# Altium PCB AVRDevBoard.PcbDoc (part 3 of 3)
Units mm, origin at the board's own origin, x right, y up, seen from the top; angles counter-clockwise.
Board outline 84.2 x 55.88 mm, 2 copper layers (Top Layer, Bottom Layer); 37 components, 46 nets, 157 pads, 38 vias.
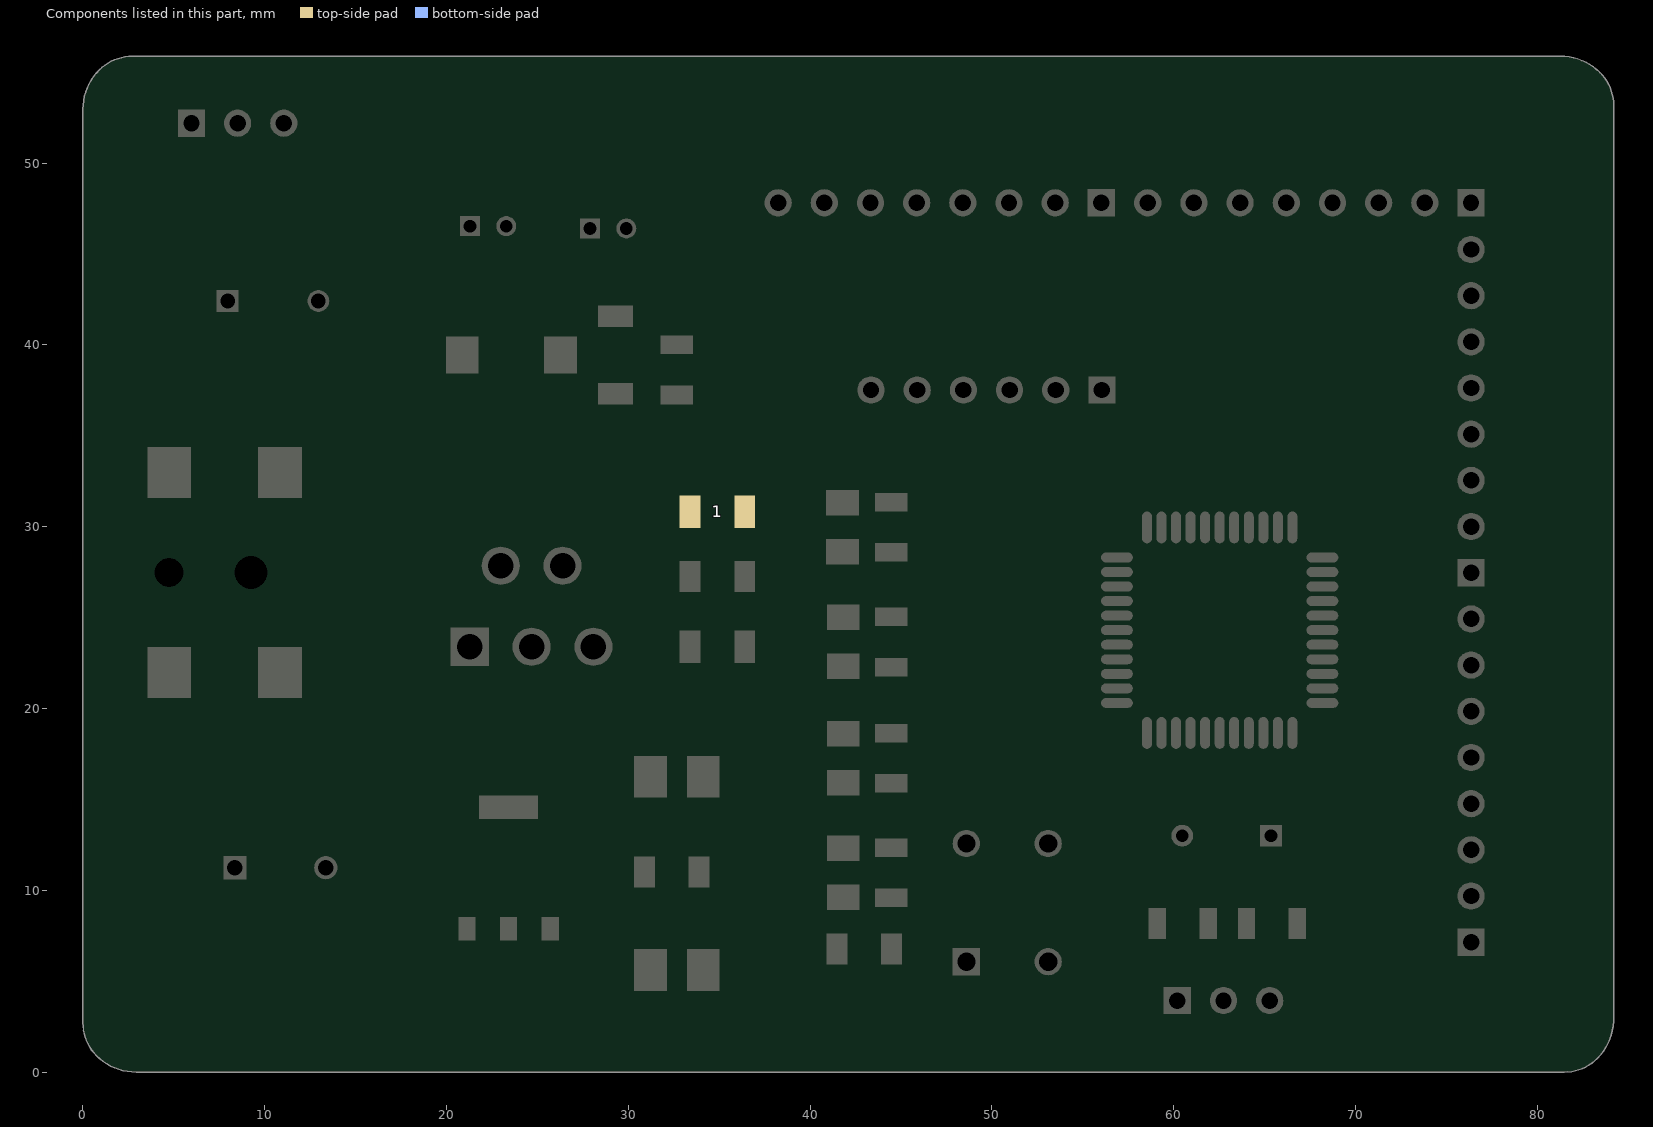
[diagram p3: the components of this part, seen from the top]

## Via types
v1: diameter 0.6, hole 0.3, Top Layer to Bottom Layer, 24 vias
v2: diameter 0.5, hole 0.3, Top Layer to Bottom Layer, 13 vias
v3: diameter 0.7, hole 0.4, Top Layer to Bottom Layer, 1 vias

## Nets (pads, with @x,y where several pads share a name; then routed paths per layer and width w, separated by ;. In a path a pad name is that pad's centre, name@x,y a point inside that pad or via, vN(x,y) a via of type N, cw(c..) or ccw(c..) an arc to the next point about the centre after c; other vN are vias at no path point) (continued)
copper on no net: (continued)
  Top Layer w0.025: 68.727,34.775 68.981,34.775 ; 68.727,34.801 68.981,34.801 ; 68.727,34.826 68.981,34.826 ; 68.727,34.852 68.981,34.852 ; 68.727,34.877 68.981,34.877 ; 68.727,34.902 68.981,34.902 ; 68.727,34.928 68.981,34.928 ; 68.727,34.953 68.981,34.953 ; 68.727,34.979 68.981,34.979 ; 68.727,35.004 68.981,35.004 ; 68.727,35.029 68.981,35.029 ; 68.727,35.055 68.981,35.055 ; 68.727,35.08 68.981,35.08 ; 68.727,35.106 68.981,35.106 ; 68.727,35.131 68.981,35.131 ; 68.727,35.156 69.006,35.156 ; 68.727,35.182 69.006,35.182 ; 68.727,35.207 69.006,35.207 ; 68.727,35.233 69.006,35.233 ; 68.727,35.258 69.057,35.258 ; 68.727,35.283 69.057,35.283 ; 68.727,35.309 69.108,35.309 ; 68.727,35.334 69.438,35.334 ; 68.727,35.36 69.438,35.36 ; 68.727,35.385 69.438,35.385 ; 68.727,35.41 69.438,35.41 ; 68.727,35.436 69.489,35.436 ; 68.727,35.461 69.489,35.461 ; 68.727,35.487 68.981,35.487 ; 68.727,35.512 68.981,35.512 ; 68.727,35.537 68.981,35.537 ; 68.727,37.341 68.752,37.341 ; 68.727,37.366 68.752,37.366 ; 68.752,38.204 68.828,38.204 ; 68.752,38.23 68.828,38.23 ; 68.752,44.986 68.828,44.986 ; 68.752,45.012 68.828,45.012 ; 68.981,36.223 69.26,36.223 ; 68.981,36.249 69.26,36.249 ; 68.981,36.274 69.26,36.274 ; 68.981,36.299 69.26,36.299 ; 68.981,36.325 69.26,36.325 ; 68.981,36.35 69.26,36.35 ; 68.981,36.376 69.26,36.376 ; 68.981,36.401 69.26,36.401 ; 68.981,36.426 69.26,36.426 ; 68.981,36.452 69.26,36.452 ; 68.981,36.477 69.26,36.477 ; 68.981,36.503 69.26,36.503 ; 68.981,36.528 69.26,36.528 ; 68.981,36.553 69.26,36.553 ; 68.981,36.579 69.26,36.579 ; 68.981,36.604 69.26,36.604 ; 68.981,36.63 69.26,36.63 ; 68.981,36.655 69.26,36.655 ; 68.981,36.68 69.26,36.68 ; 68.981,36.706 69.26,36.706 ; 68.981,36.731 69.26,36.731 ; 68.981,36.757 69.26,36.757 ; 68.981,36.782 69.26,36.782 ; 68.981,36.807 69.26,36.807 ; 68.981,36.833 69.26,36.833 ; 68.981,36.858 69.26,36.858 ; 68.981,36.884 69.26,36.884 ; 68.981,36.909 69.26,36.909 ; 68.981,36.934 69.26,36.934 ; 68.981,36.96 69.285,36.96 ; 68.981,36.985 69.285,36.985 ; 68.981,37.011 69.285,37.011 ; 68.981,37.036 69.285,37.036 ; 68.981,37.061 69.336,37.061 ; 68.981,37.087 69.387,37.087 ; 68.981,37.112 69.666,37.112 ; 68.981,37.138 69.666,37.138 ; 68.981,37.163 69.717,37.163 ; 68.981,37.188 69.768,37.188 ; 68.981,37.214 69.768,37.214 ; 68.981,37.239 69.235,37.239 ; 68.981,37.265 69.768,37.265 ; 68.981,37.29 69.26,37.29 ; 68.981,37.315 69.26,37.315 ; 69.006,35.487 69.489,35.487 ; 69.006,35.512 69.489,35.512 ; 69.006,36.198 69.26,36.198 ; 69.006,37.341 69.057,37.341 ; 69.006,37.366 69.057,37.366 ; 69.108,35.537 69.412,35.537 ; 69.158,35.309 69.209,35.309 ; 69.209,35.563 69.311,35.563 ; 69.209,37.341 69.235,37.341 ; 69.209,37.366 69.235,37.366 ; 69.235,35.309 69.387,35.309 ; 69.26,37.239 69.793,37.239 ; 69.311,35.258 69.336,35.258 ; 69.311,35.283 69.336,35.283 ; 69.311,37.29 69.743,37.29 ; 69.336,37.315 69.717,37.315 ; 69.438,37.341 69.641,37.341 ; 69.438,37.366 69.641,37.366 ; 69.489,34.775 69.768,34.775 ; 69.489,34.801 69.768,34.801 ; 69.489,34.826 69.768,34.826 ; 69.489,34.852 69.768,34.852 ; 69.489,34.877 70.428,34.877 ; 69.489,34.902 70.479,34.902 ; 69.489,34.928 70.479,34.928 ; 69.489,34.953 70.479,34.953 ; 69.489,34.979 70.479,34.979 ; 69.489,35.004 70.479,35.004 ; 69.489,35.029 70.479,35.029 ; 69.489,35.055 70.479,35.055 ; 69.489,35.08 70.428,35.08 ; 69.489,35.106 69.768,35.106 ; 69.489,35.131 69.768,35.131 ; 69.489,35.156 69.768,35.156 ; 69.489,35.182 69.768,35.182 ; 69.514,34.674 69.819,34.674 ; 69.514,34.699 69.819,34.699 ; 69.514,34.725 69.768,34.725 ; 69.514,34.75 69.768,34.75 ; 69.514,35.207 69.768,35.207 ; 69.514,35.233 69.768,35.233 ; 69.514,35.258 69.819,35.258 ; 69.514,35.283 69.819,35.283 ; 69.539,34.598 70.428,34.598 ; 69.539,34.623 70.378,34.623 ; 69.539,34.648 69.92,34.648 ; 69.539,35.309 69.87,35.309 ; 69.539,37.061 69.641,37.061 ; 69.539,37.087 69.641,37.087 ; 69.59,34.547 70.403,34.547 ; 69.59,34.572 70.428,34.572 ; 69.59,35.334 70.378,35.334 ; 69.59,35.36 70.378,35.36 ; 69.59,35.385 70.327,35.385 ; 69.59,35.41 70.327,35.41 ; 69.641,34.496 70.378,34.496 ; 69.641,34.521 70.378,34.521 ; 69.641,35.436 70.301,35.436 ; 69.666,34.471 70.327,34.471 ; 69.666,35.461 70.301,35.461 ; 69.692,34.445 70.301,34.445 ; 69.717,35.487 70.225,35.487 ; 69.717,35.512 70.225,35.512 ; 69.743,36.579 69.997,36.579 ; 69.743,36.604 69.997,36.604 ; 69.743,36.63 69.997,36.63 ; 69.743,36.655 69.997,36.655 ; 69.743,36.68 69.997,36.68 ; 69.743,36.706 69.997,36.706 ; 69.743,36.731 69.997,36.731 ; 69.743,36.757 69.997,36.757 ; 69.743,36.782 69.997,36.782 ; 69.743,36.807 69.997,36.807 ; 69.743,36.833 69.997,36.833 ; 69.743,36.858 69.997,36.858 ; 69.743,36.884 69.997,36.884 ; 69.743,36.909 69.997,36.909 ; 69.743,36.934 69.997,36.934 ; 69.768,34.42 70.2,34.42 ; 69.768,35.537 70.149,35.537 ; 69.768,36.452 70.2,36.452 ; 69.768,36.477 70.098,36.477 ; 69.768,36.503 70.098,36.503 ; 69.768,36.528 70.047,36.528 ; 69.768,36.553 70.047,36.553 ; 69.768,36.96 70.047,36.96 ; 69.768,36.985 70.047,36.985 ; 69.768,37.011 70.073,37.011 ; 69.768,37.036 70.073,37.036 ; 69.768,37.061 70.149,37.061 ; 69.819,36.401 70.682,36.401 ; 69.819,36.426 70.2,36.426 ; 69.819,37.087 70.174,37.087 ; 69.819,37.112 70.657,37.112 ; 69.819,37.138 70.657,37.138 ; 69.844,36.35 70.708,36.35 ; 69.844,36.376 70.708,36.376 ; 69.844,37.163 70.682,37.163 ; 69.87,34.394 70.149,34.394 ; 69.87,36.299 70.632,36.299 ; 69.87,36.325 70.632,36.325 ; 69.87,37.188 70.632,37.188 ; 69.87,37.214 70.632,37.214 ; 69.92,35.563 70.022,35.563 ; 69.92,36.274 70.581,36.274 ; 69.92,37.239 70.581,37.239 ; 69.92,37.265 70.581,37.265 ; 69.971,36.249 70.555,36.249 ; 69.997,37.29 70.53,37.29 ; 70.022,36.198 70.479,36.198 ; 70.022,36.223 70.479,36.223 ; 70.022,37.315 70.479,37.315 ; 70.073,34.648 70.352,34.648 ; 70.073,35.309 70.403,35.309 ; 70.098,35.258 70.428,35.258 ; 70.098,35.283 70.403,35.283 ; 70.149,35.207 70.428,35.207 ; 70.149,35.233 70.428,35.233 ; 70.149,37.341 70.403,37.341 ; 70.149,37.366 70.403,37.366 ; 70.174,35.131 70.428,35.131 ; 70.174,35.156 70.428,35.156 ; 70.174,35.182 70.428,35.182 ; 70.2,34.674 70.301,34.674 ; 70.2,34.699 70.301,34.699 ; 70.2,35.106 70.428,35.106 ; 70.2,36.172 70.352,36.172 ; 70.352,36.426 70.632,36.426 ; 70.352,36.452 70.632,36.452 ; 70.352,37.087 70.632,37.087 ; 70.403,37.061 70.632,37.061 ; 70.428,36.477 70.581,36.477 ; 70.428,36.503 70.581,36.503 ; 70.428,37.036 70.581,37.036 ; 70.454,37.011 70.555,37.011 ; 70.479,36.528 70.53,36.528 ; 70.733,36.579 70.987,36.579 ; 70.733,36.604 70.987,36.604 ; 70.733,36.63 70.987,36.63 ; 70.733,36.655 70.987,36.655 ; 70.733,36.68 71.673,36.68 ; 70.733,36.706 71.673,36.706 ; 70.733,36.731 71.673,36.731 ; 70.733,36.757 71.673,36.757 ; 70.733,36.782 71.673,36.782 ; 70.733,36.807 71.673,36.807 ; 70.733,36.833 71.673,36.833 ; 70.733,36.858 71.673,36.858 ; 70.733,36.884 71.673,36.884 ; 70.733,36.909 70.987,36.909 ; 70.733,36.934 70.987,36.934 ; 70.733,36.96 70.987,36.96 ; 70.759,36.452 71.089,36.452 ; 70.759,36.477 71.063,36.477 ; 70.759,36.503 71.063,36.503 ; 70.759,36.528 70.987,36.528 ; 70.759,36.553 70.987,36.553 ; 70.759,36.985 70.987,36.985 ; 70.759,37.011 71.038,37.011 ; 70.759,37.036 71.038,37.036 ; 70.759,37.061 71.063,37.061 ; 70.784,36.401 71.622,36.401 ; 70.784,36.426 71.089,36.426 ; 70.784,37.087 71.089,37.087 ; 70.784,37.112 71.622,37.112 ; 70.784,37.138 71.622,37.138 ; 70.835,36.35 71.648,36.35 ; 70.835,36.376 71.648,36.376 ; 70.835,37.163 71.622,37.163 ; 70.86,36.299 71.622,36.299 ; 70.86,36.325 71.622,36.325 ; 70.86,37.188 71.571,37.188 ; 70.86,37.214 71.571,37.214 ; 70.911,36.274 71.597,36.274 ; 70.911,37.239 71.521,37.239 ; 70.911,37.265 71.521,37.265 ; 70.936,36.249 71.521,36.249 ; 70.962,37.29 71.444,37.29 ; 70.962,37.315 71.419,37.315 ; 71.013,36.198 71.47,36.198 ; 71.013,36.223 71.47,36.223 ; 71.089,37.341 71.343,37.341 ; 71.089,37.366 71.343,37.366 ; 71.14,36.172 71.343,36.172 ; 71.292,37.087 71.648,37.087 ; 71.343,36.426 71.597,36.426 ; 71.343,36.452 71.597,36.452 ; 71.343,37.061 71.648,37.061 ; 71.394,36.477 71.521,36.477 ; 71.394,36.934 71.673,36.934 ; 71.394,36.96 71.673,36.96 ; 71.394,36.985 71.673,36.985 ; 71.394,37.011 71.673,37.011 ; 71.394,37.036 71.673,37.036 ; 71.419,36.503 71.521,36.503 ; 71.419,36.909 71.673,36.909

## Polygon pours and split planes (outlines as drawn)
GND on Top Layer "Top Layer-No Net" (solid, pour order 0): 0,2.716 0,52.959 cw(c3.066,52.959) 0.898,55.127 cw(c2.716,53.309) 2.716,55.88 81.28,55.88 cw(c81.28,52.814) 83.448,54.982 cw(c81.63,53.164) 84.201,53.164 84.201,3.048 84.198,3.048 cw(c81.135,2.921) 83.303,0.753 cw(c81.485,2.571) 81.485,0 2.921,0 cw(c2.921,3.066) 0.753,0.898 cw(c2.571,2.716)

## Other copper
Top Layer:
  pour cut-out: 62.865,5.334 51.054,17.145 74.295,17.145 74.422,17.018 62.865,5.461
  pour cut-out: 66.294,55.118 66.294,52.832 18.923,52.832 18.923,55.118
  pour cut-out: 74.086,14.786
  text "DESIGNED BY ANIL EFE FOR OPEN SOURCE HARDWARE" at 20.581,53.435 h1

## Silkscreen, mask and mechanical layers (free items; w line width, h text height)
Top Overlay:
  lines w0.5: 0.626,3.613 0.626,52.442 cw(c3.692,52.442) 1.524,54.61 cw(c3.342,52.792) 3.342,55.363 ; 0.63,3.62 ccw(c3.201,3.62) 1.383,1.802 ccw(c3.551,3.97) 3.551,0.904 ; 3.244,55.361 80.549,55.361 ; 3.551,0.9 80.756,0.9 ; 80.55,55.36 cw(c80.55,52.294) 82.719,54.462 cw(c80.901,52.644) 83.471,52.644 ; 80.756,0.905 ccw(c80.756,3.476) 82.574,1.658 ccw(c80.406,3.826) 83.472,3.826 ; 83.473,3.796 83.473,52.654
  text "3.3V" at 6.734,53.893 h1
  text "PB0" at 38.799,49.801 h1 r90
  text "PB2" at 43.841,49.798 h1 r90
  text "PB3" at 46.365,49.801 h1 r90
  text "PB4" at 48.897,49.803 h1 r90
  text "PB5" at 51.407,49.806 h1 r90
  text "PB6" at 53.975,49.802 h1 r90
  text "PB7" at 56.512,49.808 h1 r90
  text "RX" at 59.246,49.801 h1 r90
  text "PD2" at 64.288,49.798 h1 r90
  text "PD3" at 66.812,49.801 h1 r90
  text "PD4" at 69.344,49.803 h1 r90
  text "PD5" at 71.854,49.806 h1 r90
  text "PD6" at 74.422,49.802 h1 r90
  text "PD7" at 76.959,49.808 h1 r90
  text "PB1" at 41.325,49.788 h1 r90
  text "TX" at 61.772,49.788 h1 r90
  text "+5V" at 4.05,49.516 h1
  text "GND" at 10.019,49.516 h1
  text "PC7" at 78.494,44.739 h1
  text "PC6" at 78.481,42.212 h1
  text "PC5" at 78.491,39.697 h1
  text "MOSI" at 43.956,39.102 h1 r90
  text "MISO" at 46.496,39.102 h1 r90
  text "SCK" at 49.036,39.102 h1 r90
  text "RST" at 51.576,39.102 h0.8 r90
  text "+5V" at 54.243,39.102 h0.8 r90
  text "GND" at 56.656,39.102 h0.8 r90
  text "PC4" at 78.494,37.173 h1
  text "PC3" at 78.497,34.64 h1
  text "DIOGENES V1.0" at 42.449,34.203 h1.5
  text "ICSP" at 41.102,33.955 h3.3 r90
  text "5V" at 34.089,32.429 h1
  text "PC2" at 78.499,32.131 h1
  text "PC1" at 78.495,29.563 h1
  text "PC0" at 78.502,27.025 h1
  text "3.3V" at 33.199,24.987 h1
  text "ADC7" at 78.494,24.292 h1
  text "ADC6" at 78.481,21.765 h1
  text "ADC5" at 78.491,19.25 h1
  text "ADC4" at 78.494,16.726 h1
  text "ADC3" at 78.497,14.193 h1
  text "ADC2" at 78.499,11.684 h1
  text "ADC1" at 78.495,9.116 h1
  text "ADC0" at 78.502,6.578 h1
  text "RESET" at 46.6,2.54 h1.8
  text "+5V" at 58.533,1.51 h0.8
  text "3.3V" at 61.454,1.51 h0.8
  text "GND" at 65.01,1.51 h0.8
Bottom Overlay:
  text "V1.0" at 81.515,49.803 h4
  text "S" at 5.923,2.459 h4
  text "E" at 10.241,2.459 h4
  text "N" at 15.829,2.459 h4
  text "E" at 20.528,2.459 h4
  text "G" at 26.116,2.459 h4
  text "O" at 31.704,2.459 h4
  text "I" at 34.498,2.459 h4
  text "D" at 39.705,2.459 h4
Top Solder:
  drawing of 1892 lines, arcs and shapes, not listed
  text "DESIGNED BY ANIL EFE FOR OPEN SOURCE HARDWARE" at 20.581,53.435 h1